# EAGLE board Empfangseinheit (EAGLE 7.7.0)
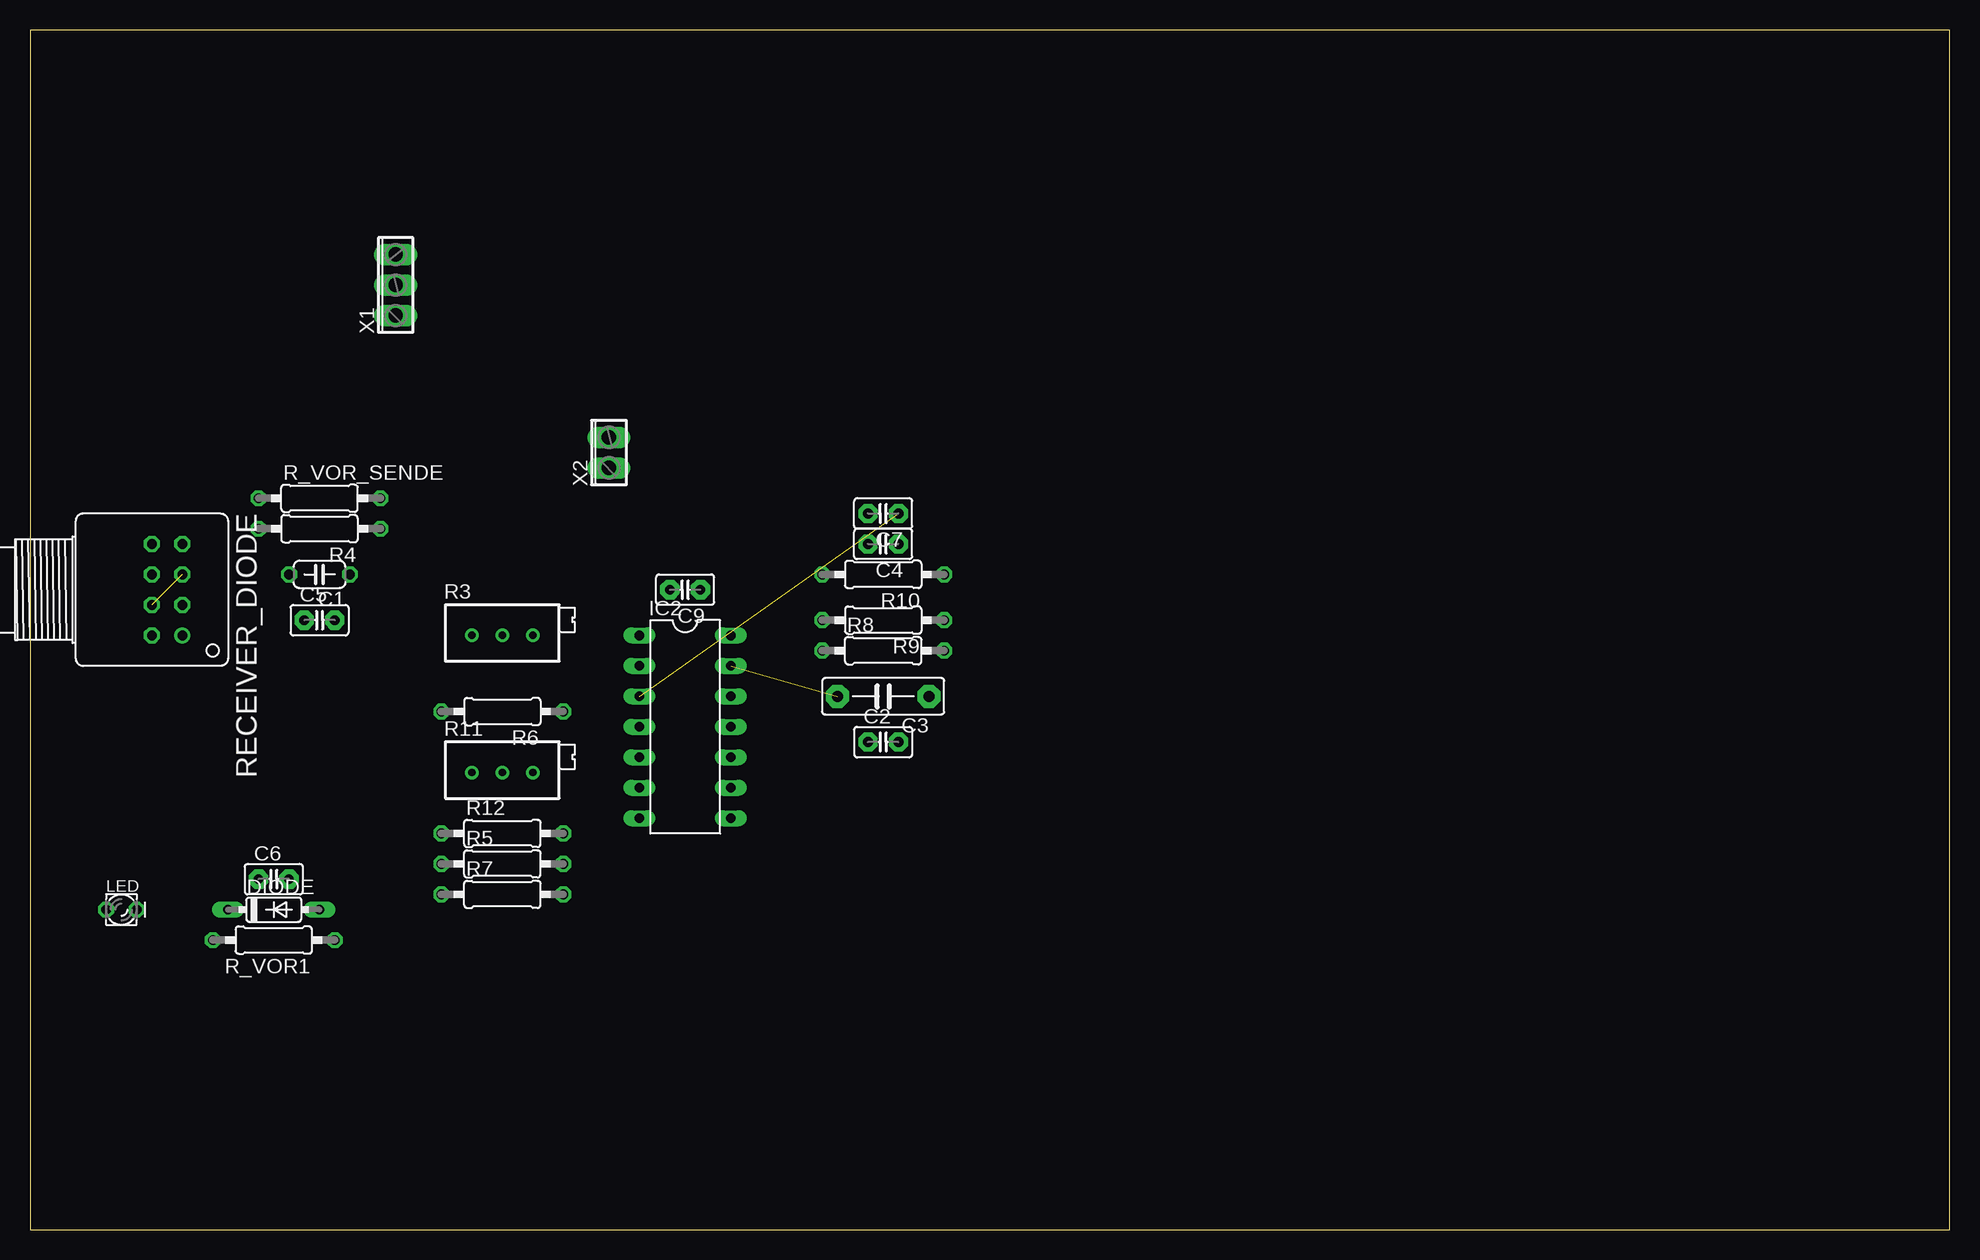
[diagram p0: board, top side]
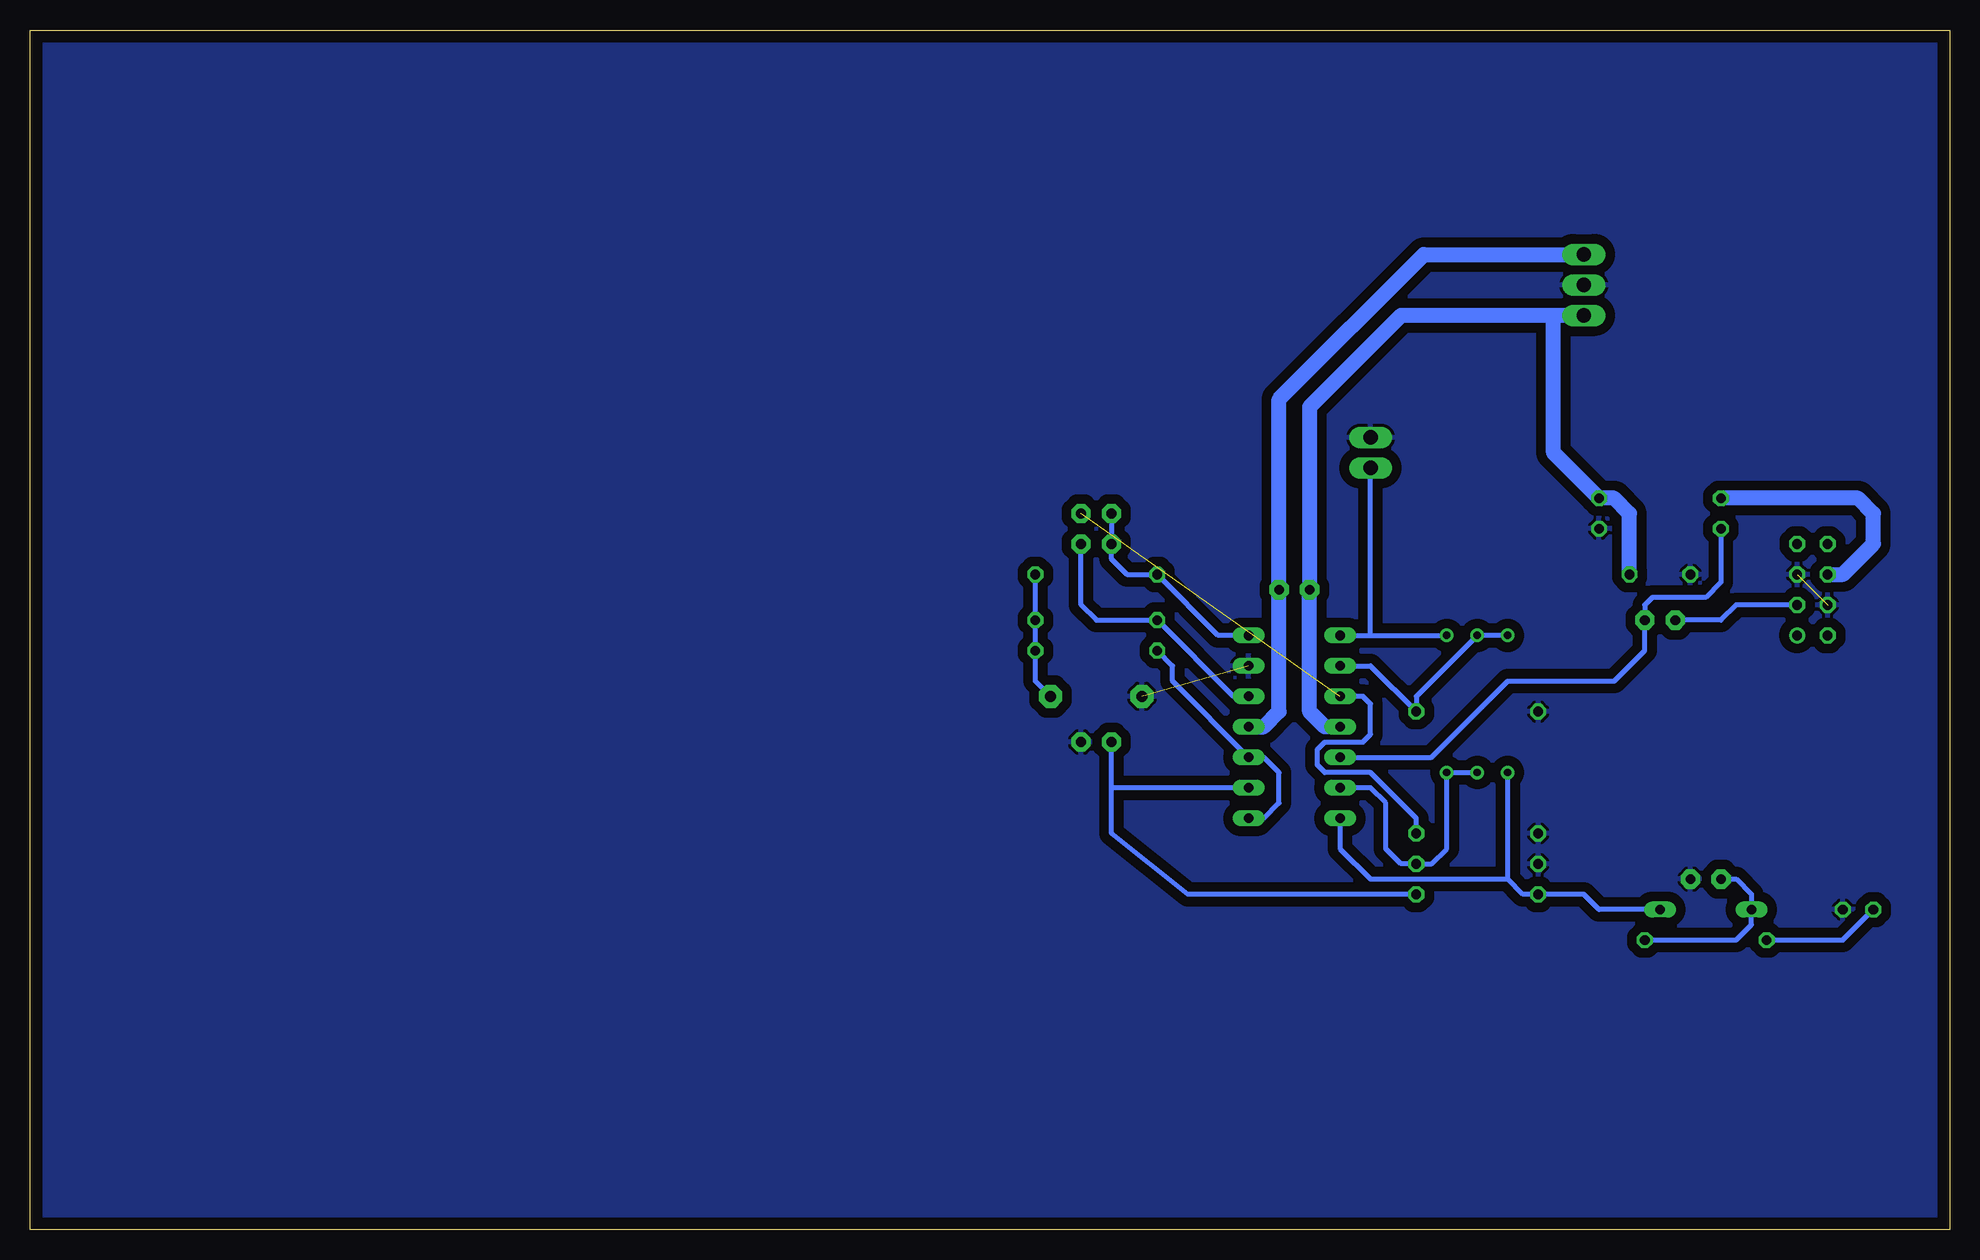
[diagram p1: board, bottom side, seen from below]

Size 160 x 100 mm. Coordinates in mm from the lower left corner, seen from the top.
Outline: 0,0 160,0 160,100 0,100 0,0
Copper layers (1*16): Top 0.035mm / dielectric 1.5mm / Bottom 0.035mm
Design rules "default": minimum track width 10mil, minimum drill 24mil, track to track 8mil, track to pad 8mil, pad to pad 8mil, via to via 8mil, smd to smd 8mil, copper to edge 40mil, drill to drill 8mil, minimum pad ring 10mil, minimum via ring 8mil, stop-mask expansion 4mil, vias tented up to drill 0mil, thermal gap 10mil

## Footprints (pad centres in the part's own frame; a part is rotated, then mirrored left to right if it is on the bottom)
C050-024X044 = drill 0.813 octagon: 1 -2.54,0; 2 2.54,0
C2.5-2 = drill 0.813 pad 1.6 octagon: 1 -1.27,0; 2 1.27,0
C7.5B3 = drill 0.914 pad 1.905 octagon: 1 -3.81,0; 2 3.81,0
DIODE_DO35-7 = drill 0.813 long: A 3.81,0; C -3.81,0
DIL14 = drill 0.813 long: 1 -7.62,-3.81; 2 -5.08,-3.81; 3 -2.54,-3.81; 4 0,-3.81; 5 2.54,-3.81; 6 5.08,-3.81; 7 7.62,-3.81; 8 7.62,3.81; 9 5.08,3.81; 10 2.54,3.81; 11 0,3.81; 12 -2.54,3.81; 13 -5.08,3.81; 14 -7.62,3.81
LED_LD260 = drill 0.813 octagon: A -1.27,0; K 1.27,0
RTRIMT93XA = drill 0.61: 1 0,-2.54; 2 0,0; 3 0,2.54
0207/10 = drill 0.813 octagon: 1 -5.08,0; 2 5.08,0
HFBR-2416 = drill 0.813: 1 3.81,2.54 | drill 0.813 octagon: 2 1.27,2.54; 3 -1.27,2.54; 4 -3.81,2.54; 5 -3.81,0; 6 -1.27,0; 7 1.27,0; 8 3.81,0
3POL254 = drill 1.2 long: 1 -2.54,0; 2 0,0; 3 2.54,0
2POL254 = drill 1.2 long: 1 -1.27,0; 2 1.27,0

## Placement (x,y rotation side)
C1  22pF  [C050-024X044]  24.13,54.61 180 top
C2  100nF  [C2.5-2]  71.12,40.64 0 top
C3  1µF  [C7.5B3]  71.12,44.45 180 top
C4  100nF  [C2.5-2]  71.12,57.15 180 top
C5  100nF  [C2.5-2]  24.13,50.8 0 top
C6  1µF  [C2.5-2]  20.32,29.21 0 top
C7  100nF  [C2.5-2]  71.12,59.69 180 top
C9  100nF  [C2.5-2]  54.61,53.34 180 top
DIODE  [DIODE_DO35-7]  20.32,26.67 0 top
IC2  TL074P  [DIL14]  54.61,41.91 270 top
LED  [LED_LD260]  7.62,26.67 0 top
R3  50k  [RTRIMT93XA]  39.37,49.53 270 top
R4  33k  [0207/10]  24.13,58.42 180 top
R5  1k  [0207/10]  39.37,30.48 0 top
R6  1k  [0207/10]  39.37,43.18 180 top
R7  15k  [0207/10]  39.37,27.94 0 top
R8  6,8k  [0207/10]  71.12,48.26 0 top
R9  4,7k  [0207/10]  71.12,50.8 180 top
R10  6,8k  [0207/10]  71.12,54.61 180 top
R11  500k  [RTRIMT93XA]  39.37,38.1 270 top
R12  1M  [0207/10]  39.37,33.02 0 top
R_VOR1  33  [0207/10]  20.32,24.13 180 top
R_VOR_SENDE  10  [0207/10]  24.13,60.96 0 top
RECEIVER_DIODE  HFBR-2416  [HFBR-2416]  10.16,53.34 270 top
X1  +5V,0V,-5V  [3POL254]  30.48,78.74 90 top
X2  [2POL254]  48.26,64.77 90 top

## Library data of the parts
C1 = rcl
C2-C7 C9 = capacitor-wima
DIODE = eagle-ltspice; SPICEMODEL: diode; SPICEPREFIX: D
IC2 = linear
LED = eagle-ltspice; SPICEMODEL: NONE; SPICEPREFIX: D; SPICETYPE: diode
R3 R11 = resistor
R4-R10 R12 R_VOR1 R_VOR_SENDE = resistor; SPICEPREFIX: R
RECEIVER_DIODE = RecieverDiode_HFBR2416
X1 X2 = con-phoenix-254; OC_FARNELL: unknown; OC_NEWARK: unknown

## Nets
FINAL_OUTPUT: IC2.1 R3.3 X2.1
FINAL_SIGNAL: IC2.2 R3.1 R3.2 R6.1
GND: C1.2 C2.2 C3.2 C6.2 IC2.13 LED.K R4.1 R5.1 R6.2 R12.1 RECEIVER_DIODE.3 RECEIVER_DIODE.7 X1.2 X2.2
N$1: C3.1 R8.2 R9.1 R10.1
N$2: C4.1 IC2.12 R9.2
N$3: C5.1 RECEIVER_DIODE.2
N$4: IC2.6 R5.2 R11.2 R11.3
N$5: C5.2 IC2.5 R4.2
N$6: C2.1 IC2.9 R7.2
N$8: C6.1 DIODE.C R_VOR1.1
N$9: R_VOR_SENDE.1 RECEIVER_DIODE.6
N$10: C7.1 IC2.3 R12.2
N$11: IC2.8 IC2.10 R8.1
N$13: LED.A R_VOR1.2
POST_AMP: DIODE.A IC2.7 R7.1 R11.1
POST_FILTER: C4.2 C7.2 IC2.14 R10.2
V+: C1.1 C9.2 IC2.4 R_VOR_SENDE.2 X1.1
V-: C9.1 IC2.11 X1.3

## Tracks (layer width: path | path; a pad name or v marks a point on that pad's centre or on a via)
FINAL_OUTPUT
  Bottom 0.406: R3.3 IC2.1 48.26,49.53 X2.1
FINAL_SIGNAL
  Bottom 0.406: IC2.2 48.26,46.99 R6.1 44.45,44.45 R3.2 R3.1
GND  (2 unrouted)
  pour Bottom (isolate 0.813): 0,100.33 0,0 160.02,0 160.02,100.33
N$1
  Bottom 0.406: C3.1 76.2,45.72 R8.2 R9.1 R10.1
N$2
  Bottom 0.406: IC2.12 59.69,44.45 R9.2 71.12,50.8 72.39,52.07 C4.1
N$3
  Bottom 0.406: RECEIVER_DIODE.2 17.78,52.07 19.05,50.8 C5.1
N$4
  Bottom 0.406: R11.2 R11.3 41.91,31.75 43.18,30.48 R5.2 45.72,30.48 46.99,31.75 46.99,35.56 48.26,36.83 IC2.6
N$5
  Bottom 0.406: R4.2 19.05,53.98 20.32,52.7 24.77,52.7 25.4,52.07 C5.2 25.4,48.26 27.94,45.72 36.83,45.72 43.18,39.37 IC2.5
N$6
  Bottom 0.406: 69.85,36.83 69.85,33.02 63.5,27.94 R7.2 | 69.85,36.83 C2.1 | IC2.9 69.85,36.83
N$8
  Bottom 0.406: C6.1 17.78,29.21 16.51,27.94 DIODE.C 16.51,25.4 17.78,24.13 R_VOR1.1
N$9
  Bottom 1.27: RECEIVER_DIODE.6 8.89,54.61 6.35,57.15 6.35,59.69 7.62,60.96 R_VOR_SENDE.1
N$10  (1 unrouted)
  Bottom 0.406: R12.2 44.45,34.29 48.26,38.1 52.07,38.1 52.7,38.73 52.7,40.01 52.07,40.64 48.9,40.64 48.26,41.27 48.26,43.81 48.9,44.45 IC2.3
N$11
  Bottom 0.406: R8.1 64.77,46.99 64.77,45.72 IC2.10 57.15,39.37 55.88,38.1 55.88,35.56 57.15,34.29 IC2.8
N$13
  Bottom 0.406: R_VOR1.2 8.89,24.13 LED.A
POST_AMP
  Bottom 0.406: 36.83,29.21 35.56,27.94 R7.1 30.48,27.94 29.21,26.67 DIODE.A | 36.83,29.21 R11.1 | IC2.7 50.8,31.75 48.26,29.21 36.83,29.21
POST_FILTER
  Bottom 0.406: C7.2 C4.2 69.85,55.88 68.58,54.61 R10.2 60.96,49.53 IC2.14
V+
  Bottom 1.27: IC2.4 52.07,41.91 53.34,43.18 C9.2 53.34,68.58 45.72,76.2 33.02,76.2 | X1.1 33.02,76.2 | 33.02,76.2 33.02,64.77 R_VOR_SENDE.2 27.94,60.96 26.67,59.69 C1.1
V-
  Bottom 1.27: IC2.11 57.15,41.91 55.88,43.18 C9.1 55.88,69.22 43.81,81.28 X1.3